# Altium PCB GarageBeamSafety.PcbDoc
Units mil, origin at the board's own origin, x right, y up, seen from the top; angles counter-clockwise.
Board outline 4330.71 x 3346.46 mil, 2 copper layers (Top Layer, Bottom Layer); 39 components, 33 nets, 169 pads, 0 vias.
Unrouted connection lines stored in the file: 89.
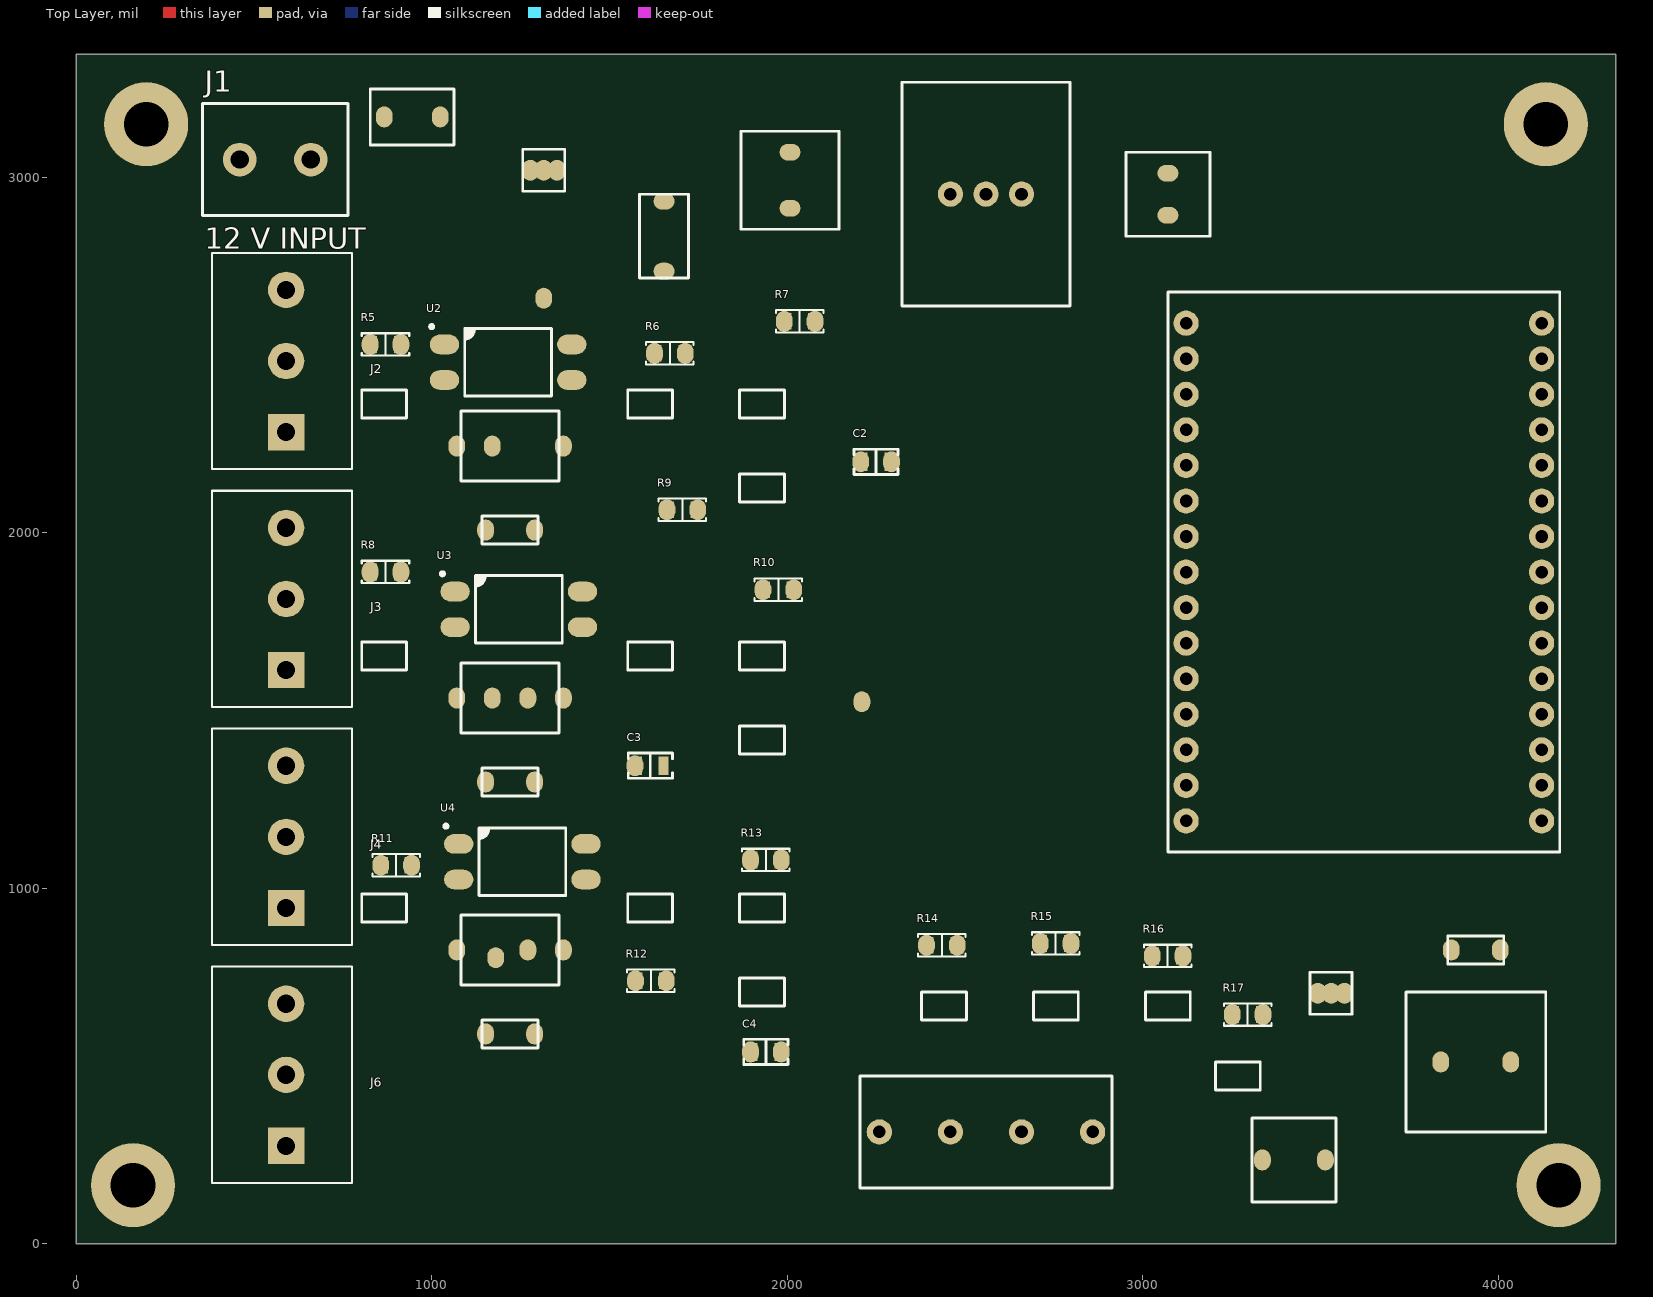
[diagram p0: Top Layer view]
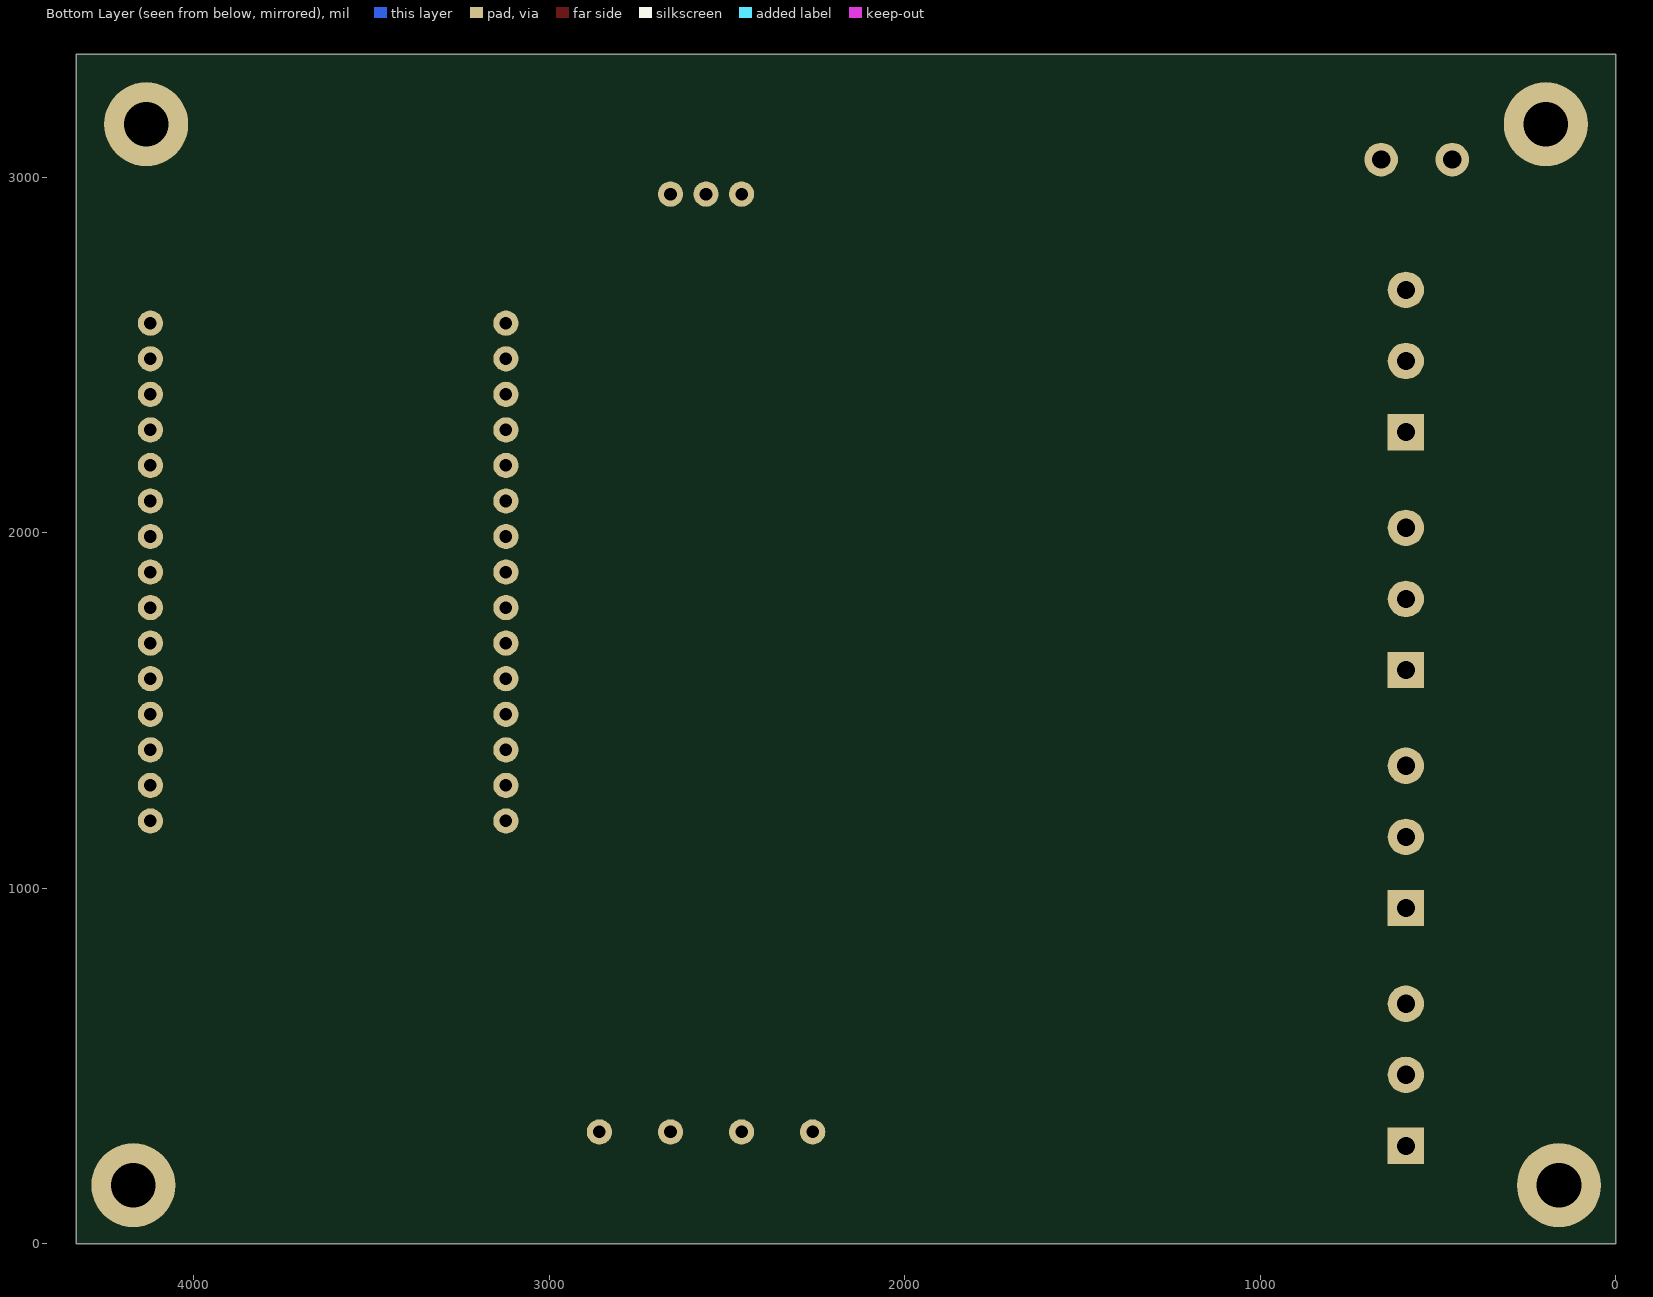
[diagram p1: Bottom Layer view, seen from below]

## Layer stack, top to bottom
Top Solder: solder mask 0.4, Solder Resist, Dk 3.5
Top Layer: signal copper 1.4
Dielectric 1: dielectric 12.6, FR-4, Dk 4.8
Bottom Layer: signal copper 1.4
Bottom Solder: solder mask 0.4, Solder Resist, Dk 3.5

## Board outline
0,0 4330.71,0 4330.71,3346.46 0,3346.46

## Design rules (kind name [scope] priority, off if disabled: settings)
Clearance [All] p1: gap=10 ignorepadtopadclearanceinfootprint=FALSE
PolygonConnect [All] p1: connectstyle=Relief reliefconductorwidth=10 reliefentries=4 polygonreliefangle="90 Angle" airgapwidth=10
RoutingVias [All] p1: holewidth=28 width=50 viastyle="Through Hole" minholewidth=28 minwidth=50 maxholewidth=28 maxwidth=50
SolderMaskExpansion [All] p1: expansion=4 istentingtop=FALSE
Width [All] p1: maxlimit=10 minlimit=10 preferedwidth=10
30 further rules are at their usual default settings.

## Components (designator, comment, footprint, x,y, rotation, side; value= is the part's Value field where it differs from the comment)
C2 "Comment" "MURATA GRM21B 0805_2012" 2250,2200 r0 top
C3 "Comment" "MURATA GRM21B 0805_2012" 1615,1345 r0 top
C4 "Comment" "MURATA GRM21B 0805_2012" 1940,540 r0 top
J1 "12 V INPUT" ?#1 560,3050 r0 top
J2 "1715734" PHOENIX_1715734_MKDS_3_508 590.55,2283.46 r90 top
J3 "1715734" PHOENIX_1715734_MKDS_3_508 590.55,1614.17 r90 top
J4 "1715734" PHOENIX_1715734_MKDS_3_508 590.55,944.88 r90 top
J6 "1715734" PHOENIX_1715734_MKDS_3_508 590.55,275.59 r90 top
R5 "Comment" "YAGEO RES 0805_2012" 870,2530 r0 top
R6 "Comment" "YAGEO RES 0805_2012" 1670,2505 r0 top
R7 "Comment" "YAGEO RES 0805_2012" 2035,2595 r0 top
R8 "Comment" "YAGEO RES 0805_2012" 870,1890 r0 top
R9 "Comment" "YAGEO RES 0805_2012" 1705,2065 r0 top
R10 "Comment" "YAGEO RES 0805_2012" 1975,1840 r0 top
R11 "Comment" "YAGEO RES 0805_2012" 900,1065 r0 top
R12 "Comment" "YAGEO RES 0805_2012" 1616.34,740 r0 top
R13 "Comment" "YAGEO RES 0805_2012" 1940,1080 r0 top
R14 "Comment" "YAGEO RES 0805_2012" 2435,840 r0 top
R15 "Comment" "YAGEO RES 0805_2012" 2755,845 r0 top
R16 "Comment" "YAGEO RES 0805_2012" 3070,810 r0 top
R17 "Comment" "YAGEO RES 0805_2012" 3295,645 r0 top
U2 "Comment" "LITEON LTV-817" 1215,2480 r0 top
U3 "Comment" "LITEON LTV-817" 1245,1785 r0 top
U4 "Comment" "LITEON LTV-817" 1255,1075 r0 top
? "" ?#2 945,3170 r0 top
? "" ?#3 1653.54,2834.65 r90 top
? "" ?#4 1315,3020 r0 top
? "" ?#2 2007.87,2992.13 r90 top
? "" ?#5 2559.06,2952.76 r0 top
? "" ?#6 3070.87,2952.76 r90 top
? "" ?#7 3622.05,1889.76 r0 top
? "" ?#8 1220.47,2007.87 r0 top
? "" ?#8 1220.47,1299.21 r0 top
? "" ?#8 1220.47,590.55 r0 top
? "" ?#9 2559.06,314.96 r0 top
? "" ?#4 3530,705 r0 top
? "" ?#3 3937.01,511.81 r0 top
? "" ?#8 3937.01,826.77 r0 top
? "" ?#10 3425.2,236.22 r0 top

## Footprints (in the part's own frame and the unit in brackets; to place one, negate y for a bottom-side part, rotate by r counter-clockwise, add the part's x,y. Pads: shape width x height; smd on the part's side, far side on the other; paste and mask are expansions set on the pad)
"LITEON LTV-817" [mm]
  oval 2.1x1.4 smd: 1(-4.55,1.27) 2(-4.55,-1.27) 3(4.55,-1.27) 4(4.55,1.27)
  silkscreen extent -5.59,-2.41 3.1,2.66, body extent -5.1,-2.3 5.1,2.3, height 3.85
"MURATA GRM21B 0805_2012" [mm]
  rect 0.7x1.3 smd: 1(-0.95,0) 2(0.95,0)
  silkscreen extent -1.58,-0.9 1.58,0.9, body extent -1,-0.63 1,0.63, height 1.25
PHOENIX_1715734_MKDS_3_508 [mm]
  rect 2.6x2.6 hole 1.3: 1(0,0)
  round 2.6 hole 1.3: 2(5.08,0) 3(10.16,0)
  silkscreen extent -2.65,-4.71 12.81,5.31, body extent -3.28,-4.6 12.7,5.2, height 13.8
"YAGEO RES 0805_2012" [mm]
  rect 0.9x1.2 smd: 1(-1.05,0) 2(1.05,0)
  silkscreen extent -1.7,-0.8 1.7,0.8, body extent -1,-0.62 1,0.63, height 0.6
?#1 [mm]
  round 2.4 hole 1.3: 1(-2.54,0) 2(2.54,0)
  silkscreen extent -5.2,-4 5.2,4, body extent -5.3,-4.1 5.3,4.1, height 10
?#2 [mm]
  oval 1.2x1.5 smd: 1(-2,0) 2(2,0)
  silkscreen extent -3,-2 3,2, body extent -3.1,-2.1 3.1,2.1, height 4
?#3 [mm]
  oval 1.2x1.5 smd: 1(-2.5,0) 2(2.5,0)
  silkscreen extent -3,-1.75 3,1.75, body extent -3.2,-1.85 3.2,1.85, height 2.5
?#4 [mm]
  oval 1.2x1.5 smd: 1(-0.95,0) 2(0,0) 3(0.95,0)
  silkscreen extent -1.5,-1.5 1.5,1.5, body extent -1.65,-1.6 1.65,1.6, height 1.5
?#5 [mm]
  round 1.8 hole 0.9: 1(-2.54,0) 2(0,0) 3(2.54,0)
  silkscreen extent -6,-8 6,8, body extent -6.1,-8.1 6.1,8.1, height 10
?#6 [mm]
  oval 1.2x1.5 smd: 1(-1.5,0) 2(1.5,0)
  silkscreen extent -3,-3 3,3, body extent -3.1,-3.1 3.1,3.1, height 10
?#7 [mm]
  round 1.8 hole 0.9: 1(-12.7,-17.78) 2(-12.7,-15.24) 3(-12.7,-12.7) 4(-12.7,-10.16) 5(-12.7,-7.62) 6(-12.7,-5.08) 7(-12.7,-2.54) 8(-12.7,0) 9(-12.7,2.54) 10(-12.7,5.08) 11(-12.7,7.62) 12(-12.7,10.16) 13(-12.7,12.7) 14(-12.7,15.24) 15(-12.7,17.78) 16(12.7,17.78) 17(12.7,15.24) 18(12.7,12.7) 19(12.7,10.16) 20(12.7,7.62) 21(12.7,5.08) 22(12.7,2.54) 23(12.7,0) 24(12.7,-2.54) 25(12.7,-5.08) 26(12.7,-7.62) 27(12.7,-10.16) 28(12.7,-12.7) 29(12.7,-15.24) 30(12.7,-17.78)
  silkscreen extent -14,-20 14,20, body extent -14.1,-20.1 14.1,20.1, height 13
?#8 [mm]
  oval 1.2x1.5 smd: 1(-1.75,0) 2(1.75,0)
  silkscreen extent -2,-1 2,1, body extent -2.45,-1.1 2.45,1.1, height 1.5
?#9 [mm]
  round 1.8 hole 0.9: 1(-7.62,0) 2(-2.54,0) 3(2.54,0) 4(7.62,0)
  silkscreen extent -9,-4 9,4, body extent -9.1,-4.1 9.1,4.1, height 10
?#10 [mm]
  oval 1.2x1.5 smd: 1(-2.25,0) 2(2.25,0)
  silkscreen extent -3,-3 3,3, body extent -3.1,-3.1 3.1,3.1, height 4

## Part data
C2 C3 C4: library part "Capacitor Cerâmico SMD", "Input RC filter"
J1: library part *, "Two-position 5.08 mm screw terminal"
J2 J3 J4 J6: library part *, "12V / GND / NPN signal terminal"
R5 R8 R11: library part Res3, "Optocoupler LED current limit"
R6 R9 R12: library part Res3, "Pull-up earns unsafe if optocoupler is off"
R7 R10 R13: library part Res3, "Input current limit"
R14 R15 R16: library part Res3, "MOSFET gate series resistor"
R17: library part Res3, "Gate-source pull-down; off while ESP32 resets"
U2 U3 U4: library part *, "Phototransistor optocoupler"

## Free pads (board coordinates)
  oval 47.24x59.06 smd: 1(826.69,1890) 1(826.69,2530) 1(856.69,1065) 1(1070.47,826.77) 1(1070.47,1535.43) 1(1070.47,2244.09) 1(1571.69,1345) 1(1573.03,740) 1(1626.69,2505) 1(1661.69,2065) 1(1896.69,540) 1(1896.69,1080) 1(1931.69,1840) 1(1991.69,2595) 1(2206.69,2200) 1(2391.69,840) 1(2711.69,845) 1(3026.69,810) 1(3251.69,645) 2(913.31,1890) 2(913.31,2530) 2(943.31,1065) 2(1170.47,1535.43) 2(1170.47,2244.09) 2(1180,805) 2(1659.65,740) 2(1713.31,2505) 2(1748.31,2065) 2(1983.31,540) 2(1983.31,1080) 2(2018.31,1840) 2(2078.31,2595) 2(2210,1525) 2(2293.31,2200) 2(2478.31,840) 2(2798.31,845) 2(3113.31,810) 2(3338.31,645) 3(1270.47,826.77) 3(1270.47,1535.43) 3(1315,2660) 4(1370.47,826.77) 4(1370.47,1535.43) 4(1370.47,2244.09)
  round 236.22 hole 125.98 unplated: H1(160,165) H2(4170,165) H3(196.85,3149.61) H4(4133.86,3149.61)

## Nets (pads, with @x,y where several pads share a name; then routed paths per layer and width w, separated by ;. In a path a pad name is that pad's centre, name@x,y a point inside that pad or via, vN(x,y) a via of type N, cw(c..) or ccw(c..) an arc to the next point about the centre after c; other vN are vias at no path point)
3V3: ?.1@3122.05,1189.76 ?.1@3838.58,511.81 ?.2@4005.91,826.77 pad.1@1573.03,740 pad.1@1626.69,2505 pad.1@1661.69,2065 R6.1 R9.1 R12.1
5V_LOGIC: ?.1@3070.87,2893.7 ?.3@2659.06,2952.76 ?.30
12V_FUSED: ?.1@1653.54,2736.22 ?.2@1023.74,3170 ?.2@1315,3020
12V_IN: ?.1@866.26,3170 J1.1
12V_SENSOR: ?.1@2007.87,2913.39 ?.1@2459.06,2952.76 ?.3@1352.4,3020 J2.1 J3.1 J4.1 J6.1 pad.1@826.69,1890 pad.1@826.69,2530 pad.1@856.69,1065 R5.1 R8.1 R11.1
BEAM1_GPIO32: ?.7 C2.1 pad.1@2206.69,2200 pad.2@2078.31,2595 R7.2
BEAM1_LED_A: ?.2@1289.37,2007.87 pad.1@1070.47,2244.09 pad.2@913.31,2530 R5.2 U2.1
BEAM1_RAW: pad.1@1991.69,2595 pad.2@1713.31,2505 pad.4@1370.47,2244.09 R6.2 R7.1 U2.4
BEAM1_SIG: ?.1@1151.57,2007.87 J2.3 pad.2@1170.47,2244.09 U2.2
BEAM2_GPIO33: ?.8 C3.1 pad.1@1571.69,1345 pad.2@2018.31,1840 R10.2
BEAM2_LED_A: ?.2@1289.37,1299.21 pad.1@1070.47,1535.43 pad.2@913.31,1890 R8.2 U3.1
BEAM2_RAW: pad.1@1931.69,1840 pad.2@1748.31,2065 pad.4@1370.47,1535.43 R9.2 R10.1 U3.4
BEAM2_SIG: ?.1@1151.57,1299.21 J3.3 pad.2@1170.47,1535.43 U3.2
BEAM3_GPIO34: ?.9 C4.1 pad.1@1896.69,540 pad.2@1983.31,1080 R13.2
BEAM3_LED_A: ?.2@1289.37,590.55 pad.1@1070.47,826.77 pad.2@943.31,1065 R11.2 U4.1
BEAM3_RAW: pad.1@1896.69,1080 pad.2@1659.65,740 pad.4@1370.47,826.77 R12.2 R13.1 U4.4
BEAM3_SIG: ?.1@1151.57,590.55 J4.3 pad.2@1180,805 U4.2
BEAM4_SIG: J6.3
BUTTON_GPIO13: ?.1@3336.61,236.22 ?.12
BUZZER_BASE: ?.1@3492.6,705 pad.2@3338.31,645 R17.2
BUZZER_GPIO14: ?.11 pad.1@3251.69,645 R17.1
BUZZER_LOW: ?.1@3868.11,826.77 ?.2@4035.43,511.81 ?.3@3567.4,705
CC1: 
CC2: 
GND: ?.1@1277.6,3020 ?.2@1653.54,2933.07 ?.2@2007.87,3070.87 ?.2@2559.06,2952.76 ?.2@3070.87,3011.81 ?.2@3122.05,1289.76 ?.2@3513.78,236.22 ?.2@3530,705 ?.4@2859.06,314.96 C2.2 C3.2 C4.2 J1.2 J2.2 J3.2 J4.2 J6.2 pad.2@1983.31,540 pad.2@2210,1525 pad.2@2293.31,2200 pad.3 U2.3 U3.3 U4.3
LED_AMBER_GPIO27: ?.3@3122.05,1389.76 pad.1@3026.69,810 R16.1
LED_AMBER_OUT: ?.3@2659.06,314.96 pad.2@3113.31,810 R16.2
LED_GREEN_GPIO25: ?.5 pad.1@2391.69,840 R14.1
LED_GREEN_OUT: ?.1@2259.06,314.96 pad.2@2478.31,840 R14.2
LED_RED_GPIO26: ?.4@3122.05,1489.76 pad.1@2711.69,845 R15.1
LED_RED_OUT: ?.2@2459.06,314.96 pad.2@2798.31,845 R15.2
VBUS: 
VBUS_FUSED: 
pads on no net: ?.6 ?.10 ?.13 ?.14 ?.15 ?.16 ?.17 ?.18 ?.19 ?.20 ?.21 ?.22 ?.23 ?.24 ?.25 ?.26 ?.27 ?.28 ?.29

## Silkscreen, mask and mechanical layers (free items; w line width, h text height)
Top Overlay:
  lines w7.87: 803.15,905.51 803.15,984.25 929.13,984.25 929.13,905.51 803.15,905.51 ; 803.15,1614.17 803.15,1692.91 929.13,1692.91 929.13,1614.17 803.15,1614.17 ; 803.15,2322.83 803.15,2401.57 929.13,2401.57 929.13,2322.83 803.15,2322.83 ; 1082.68,728.35 1082.68,925.2 1358.27,925.2 1358.27,728.35 1082.68,728.35 ; 1082.68,1437.01 1082.68,1633.86 1358.27,1633.86 1358.27,1437.01 1082.68,1437.01 ; 1082.68,2145.67 1082.68,2342.52 1358.27,2342.52 1358.27,2145.67 1082.68,2145.67 ; 1551.18,905.51 1551.18,984.25 1677.17,984.25 1677.17,905.51 1551.18,905.51 ; 1551.18,1614.17 1551.18,1692.91 1677.17,1692.91 1677.17,1614.17 1551.18,1614.17 ; 1551.18,2322.83 1551.18,2401.57 1677.17,2401.57 1677.17,2322.83 1551.18,2322.83 ; 1866.14,669.29 1866.14,748.03 1992.13,748.03 1992.13,669.29 1866.14,669.29 ; 1866.14,905.51 1866.14,984.25 1992.13,984.25 1992.13,905.51 1866.14,905.51 ; 1866.14,1377.95 1866.14,1456.69 1992.13,1456.69 1992.13,1377.95 1866.14,1377.95 ; 1866.14,1614.17 1866.14,1692.91 1992.13,1692.91 1992.13,1614.17 1866.14,1614.17 ; 1866.14,2086.61 1866.14,2165.35 1992.13,2165.35 1992.13,2086.61 1866.14,2086.61 ; 1866.14,2322.83 1866.14,2401.57 1992.13,2401.57 1992.13,2322.83 1866.14,2322.83 ; 2377.95,629.92 2377.95,708.66 2503.94,708.66 2503.94,629.92 2377.95,629.92 ; 2692.91,629.92 2692.91,708.66 2818.9,708.66 2818.9,629.92 2692.91,629.92 ; 3007.87,629.92 3007.87,708.66 3133.86,708.66 3133.86,629.92 3007.87,629.92 ; 3204.72,433.07 3204.72,511.81 3330.71,511.81 3330.71,433.07 3204.72,433.07
Mechanical 1:
  circle w7.87: c984.25,787.4 r118.11
  circle w7.87: c984.25,4724.41 r118.11
  circle w7.87: c984.25,8661.42 r118.11
  lines w7.87: 0,0 0,3346.46 4330.71,3346.46 4330.71,0 0,0